# Altium PCB PCB1.PcbDoc
Units mil, origin at the board's own origin, x right, y up, seen from the top; angles counter-clockwise.
Board outline 2415 x 1950 mil, 2 copper layers (Top Layer, Bottom Layer); 7 components, 7 nets, 20 pads, 0 vias.
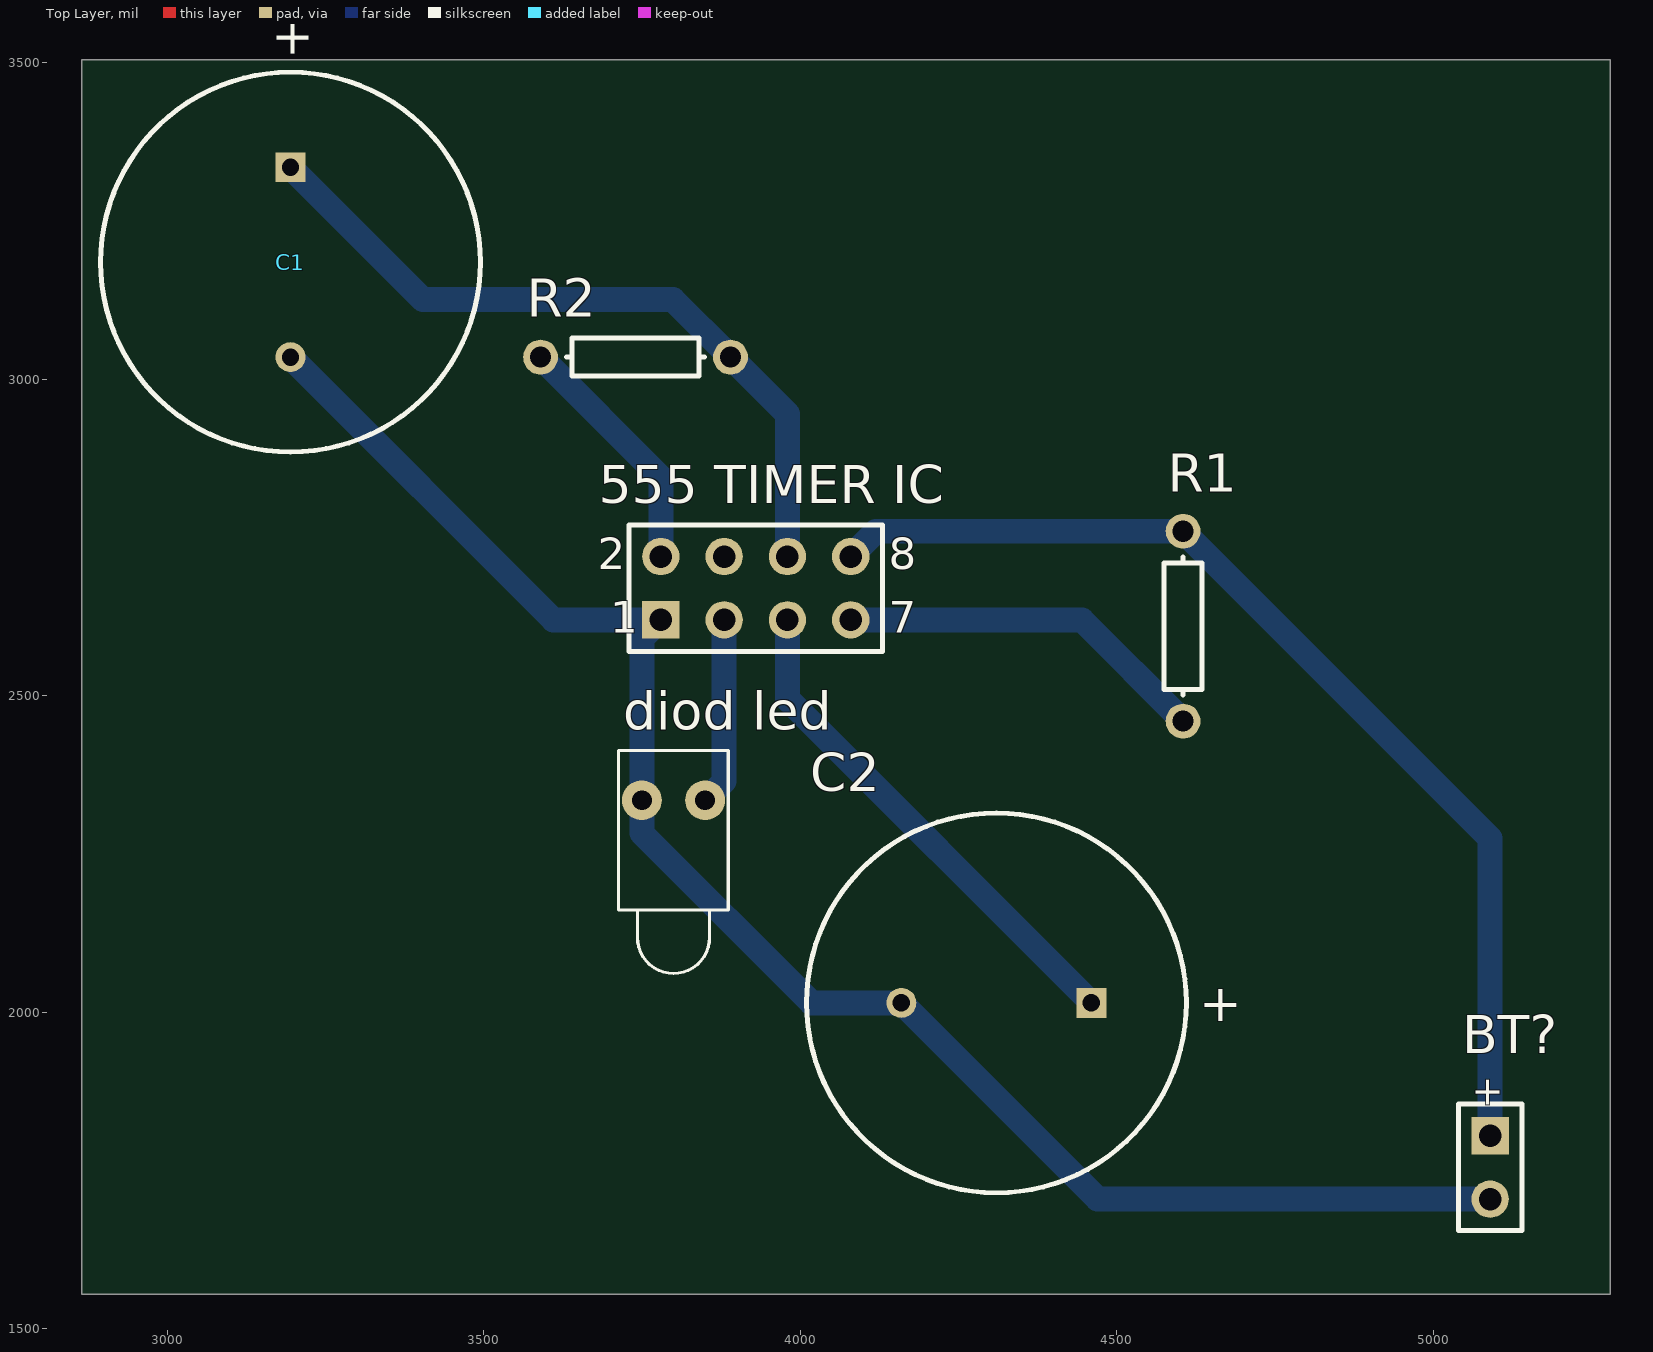
[diagram p0: Top Layer view]
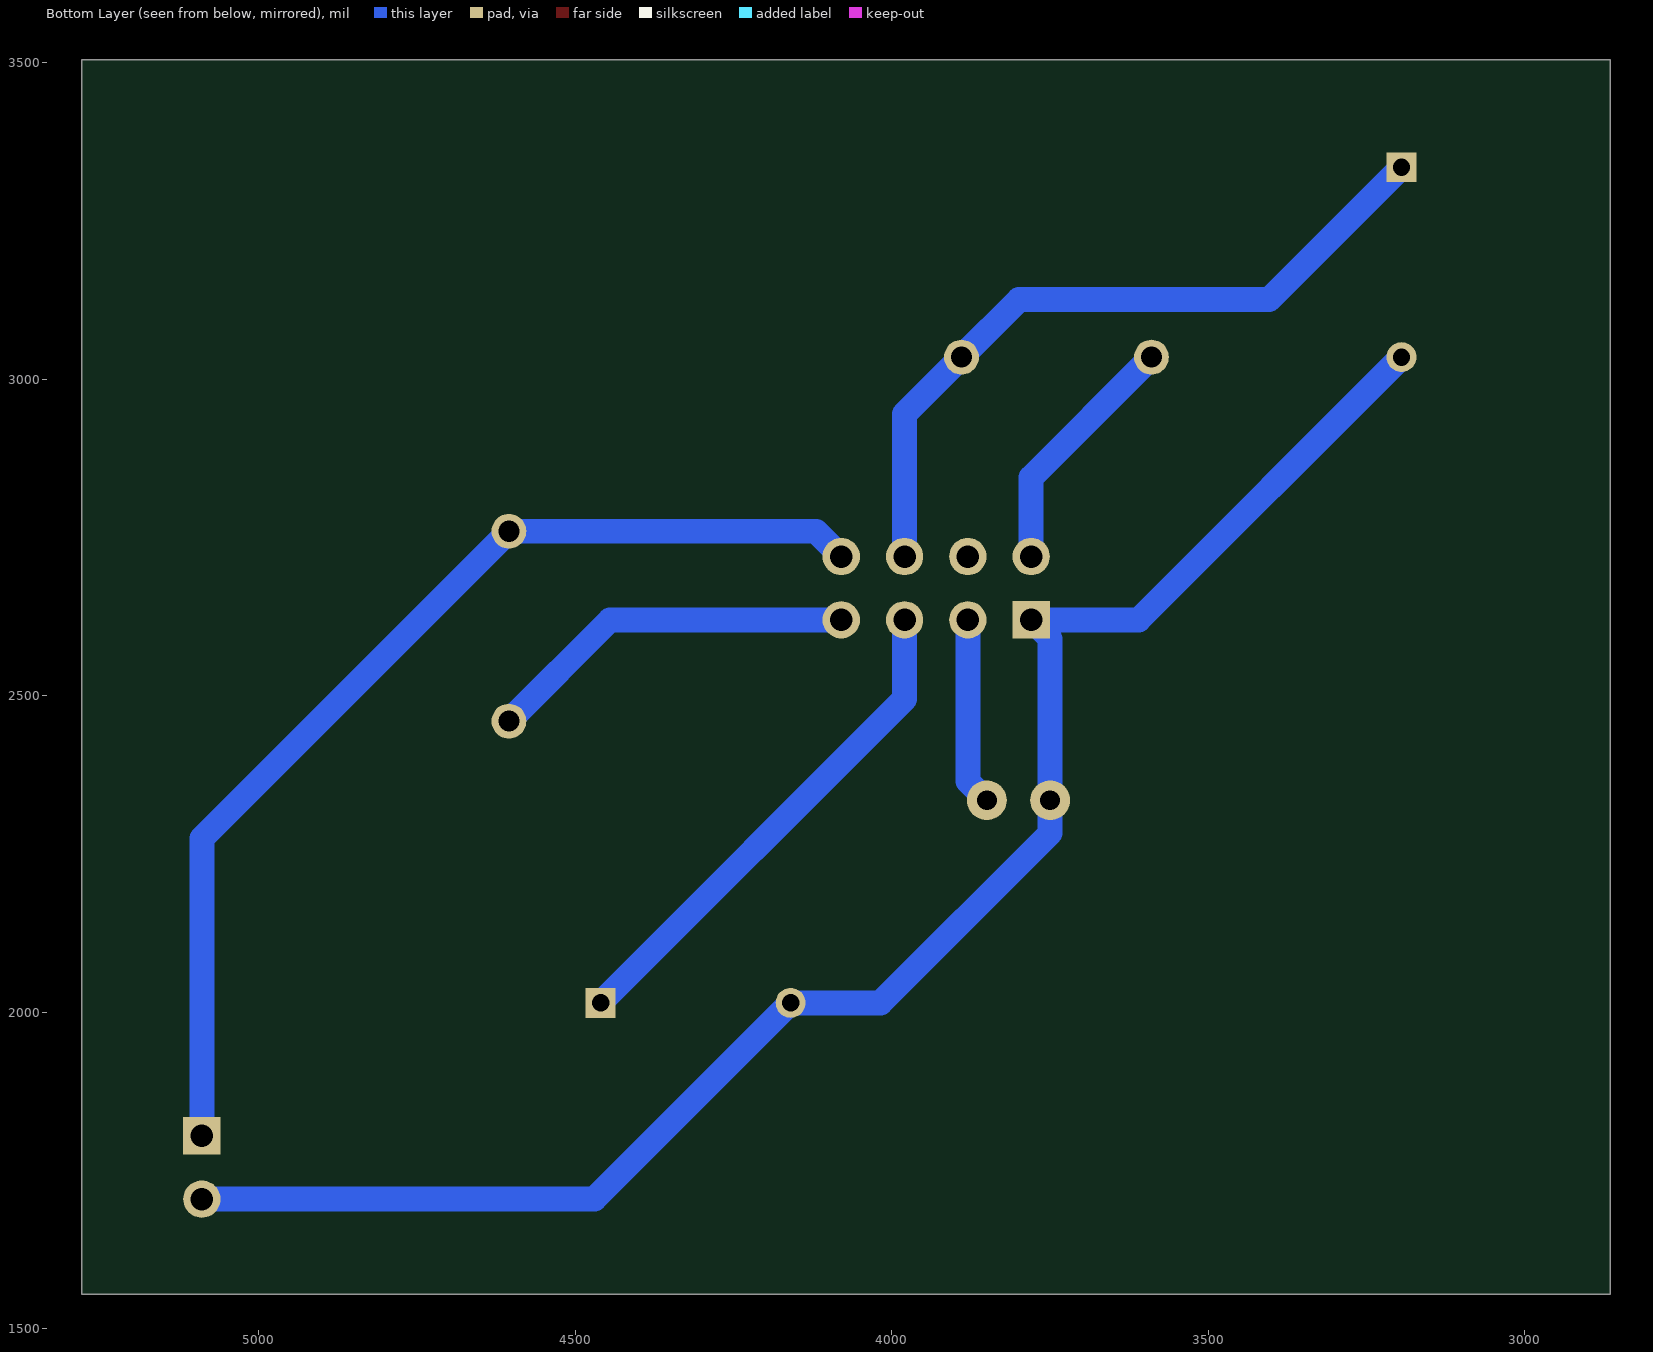
[diagram p1: Bottom Layer view, seen from below]

## Layer stack, top to bottom
Top Solder: solder mask 0.4, Solder Resist, Dk 3.5
Top Layer: signal copper 1.4
Dielectric 1: dielectric 12.6, FR-4, Dk 4.8
Bottom Layer: signal copper 1.4
Bottom Solder: solder mask 0.4, Solder Resist, Dk 3.5

## Board outline
2865,1555 5280,1555 5280,3505 2865,3505

## Design rules (kind name [scope] priority, off if disabled: settings)
Clearance [All] p1: gap=39.37 ignorepadtopadclearanceinfootprint=FALSE
PolygonConnect [All] p1: connectstyle=Direct reliefconductorwidth=10 reliefentries=4 polygonreliefangle="90 Angle" airgapwidth=10
RoomDefinition Sheet1 [InComponentClass('Sheet1')] p1: confinementstyle=ConfineIn formatcopy=TRUE lockcomponents=FALSE outline 2870,1560 5285,1560 5285,3500 2870,3500
RoutingLayers [All] p1: top layer_v5=FALSE bottom layer_v5=TRUE
RoutingVias [All] p1: holewidth=28 width=50 viastyle="Through Hole" minholewidth=28 minwidth=50 maxholewidth=28 maxwidth=50
SolderMaskExpansion [All] p1: expansion=4 istentingtop=FALSE
Width [All] p1: maxlimit=39.37 minlimit=39.37 preferedwidth=39.37
29 further rules are at their usual default settings.

## Components (designator, comment, footprint, x,y, rotation, side; value= is the part's Value field where it differs from the comment)
"555 TIMER IC" "Header 4X2" HDR2X4 3780,2620 r0 top
BT? "Battery" BAT-2 5090,1755 r270 top
C1 "Cap Pol1" RB7.6-15 3195,3185 r90 top value=10pF
C2 "Cap Pol1" RB7.6-15 4310,2015 r0 top value=0.1pF
"diod led" "LED1" LED-1 3800,2335 r270 top
R1 "Res1" AXIAL-0.3 4605,2610 r90 top value=1K
R2 "Res2" AXIAL-0.3 3740,3035 r180 top value=10k

## Footprints (in the part's own frame and the unit in brackets; to place one, negate y for a bottom-side part, rotate by r counter-clockwise, add the part's x,y. Pads: shape width x height; smd on the part's side, far side on the other; paste and mask are expansions set on the pad)
AXIAL-0.3 [mm] "Axial Device, Thru-Hole; 2 Leads; 0.3 in Pin Spacing"
  round 1.4 hole 0.85: 1(-3.81,0) 2(3.81,0)
  silkscreen extent -2.77,-0.76 2.77,0.76
BAT-2 [mm] "Battery; 2 Leads"
  rect 1.5x1.5 hole 0.9: 1(-1.27,0)
  round 1.5 hole 0.9: 2(1.27,0)
  silkscreen extent -2.54,-1.27 2.54,1.27
HDR2X4 [mm] "Connector; Header; 4x2 Position"
  rect 1.5x1.5 hole 0.9: 1(0,0)
  round 1.5 hole 0.9: 2(0,2.54) 3(2.54,0) 4(2.54,2.54) 5(5.08,0) 6(5.08,2.54) 7(7.62,0) 8(7.62,2.54)
  silkscreen extent -1.27,-1.27 8.89,3.81
LED-1 [mm] "LED; 2 Leads"
  round 1.6 hole 0.8: 1(0,1.27) 2(0,-1.27)
  silkscreen extent -2,-2.2 6.95,2.2
RB7.6-15 [mm] "Polarized Capacitor (Radial); 2 Leads"
  rect 1.2x1.2 hole 0.7: 1(3.81,0)
  round 1.2 hole 0.7: 2(-3.81,0)
  silkscreen extent -7.62,-7.62 7.62,7.62

## Part data
"555 TIMER IC": "Header, 4-Pin, Dual row", LatestRevisionDate=17-Jul-2002, LatestRevisionNote="Re-released for DXP Platform.", Publisher="Altium Limited"
BT?: "Multicell Battery", LatestRevisionDate=17-Jul-2002, LatestRevisionNote="Re-released for DXP Platform.", PackageDescription="Battery; 2 Leads", PackageReference=BAT-2, Published=24-Mar-1999, Publisher="Altium Limited"
C1 C2: "Polarized Capacitor (Radial)", LatestRevisionDate=17-Jul-2002, LatestRevisionNote="Re-released for DXP Platform.", PackageDescription="Polarized Capacitor (Radial); 2 Leads", PackageReference=RB7.6-15, Published=8-Jun-2000, Publisher="Altium Limited"
"diod led": "Typical RED GaAs LED", LatestRevisionDate=08-Jul-2005, LatestRevisionNote="Mech Layer 1 removed.", PackageDescription="LED; 2 Leads", PackageReference=LED-1, Published=8-Jun-2000, Publisher="Altium Limited"
R1: "Resistor", LatestRevisionDate=17-Jul-2002, LatestRevisionNote="Re-released for DXP Platform.", PackageDescription="Axial Device, Thru-Hole; 2 Leads; 0.3 in Pin Spacing", PackageReference=AXIAL-0.3, Published=8-Jun-2000, Publisher="Altium Limited"
R2: library part Res1, "Resistor", LatestRevisionDate=17-Jul-2002, LatestRevisionNote="Re-released for DXP Platform.", PackageDescription="Axial Device, Thru-Hole; 2 Leads; 0.3 in Pin Spacing", PackageReference=AXIAL-0.3, Published=8-Jun-2000, Publisher="Altium Limited"

## Nets (pads, with @x,y where several pads share a name; then routed paths per layer and width w, separated by ;. In a path a pad name is that pad's centre, name@x,y a point inside that pad or via, vN(x,y) a via of type N, cw(c..) or ccw(c..) an arc to the next point about the centre after c; other vN are vias at no path point)
" R2thre": "555 TIMER IC.7" R1.1 | length 591.3
  Bottom Layer w39.37: 4080,2620 4445,2620 R1.1
c2: "555 TIMER IC.5" C2.1 | length 803.8
  Bottom Layer w39.37: 3980,2620 3980,2495 C2.1
GND: "555 TIMER IC.1" "diod led.2" BT?.2 C1.2 C2.2 | length 2685.7
  Bottom Layer w39.37: C1.2 3610,2620 3780,2620 3750,2590 3750,2335 3750,2283 4018,2015 C2.2 4470,1705 BT?.2
out: "555 TIMER IC.3" "diod led.1" | length 297.4
  Bottom Layer w39.37: 3850,2335 3880,2365 3880,2620
"postive terminal": "555 TIMER IC.8" BT?.1 R1.2 | length 1697.5
  Bottom Layer w39.37: 4080,2720 4120,2760 R1.2 5090,2275 BT?.1
R2: "555 TIMER IC.2" R2.2 | length 393.7
  Bottom Layer w39.37: R2.2 3780,2845 3780,2720
R2thre: "555 TIMER IC.6" C1.1 R2.1 | length 1171.5
  Bottom Layer w39.37: C1.1 3404,3126 3799,3126 R2.1 3980,2945 3980,2720
pads on no net: "555 TIMER IC.4"

## Dimensions
5275,3495 to 5270,1565 on Top Layer
2855,3500 to 5275,3495 on Top Layer

## Text inside footprints (layer, text, board x,y; h text height)
"555 TIMER IC": Top Overlay "2" at 3680,2700 h50; Top Overlay "1" at 3700,2600 h50; Top Overlay "7" at 4140,2600 h50; Top Overlay "8" at 4140,2700 h50
BT?: Top Overlay "+" at 5067.28,1899.49 h45.28 r270
C1: Top Overlay "+" at 3224.01,3505.15 h59.06 r90
C2: Top Overlay "+" at 4630.15,1985.99 h59.06